# Altium PCB 电子脚铐便携式主控板V3-改版.PcbDoc (part 1 of 3)
Units mm, origin at the board's own origin, x right, y up, seen from the top; angles counter-clockwise.
Board outline 54 x 110 mm, 2 copper layers (Top Layer, Bottom Layer), stack 1.671 mm thick; 103 components, 64 nets, 340 pads, 43 vias.
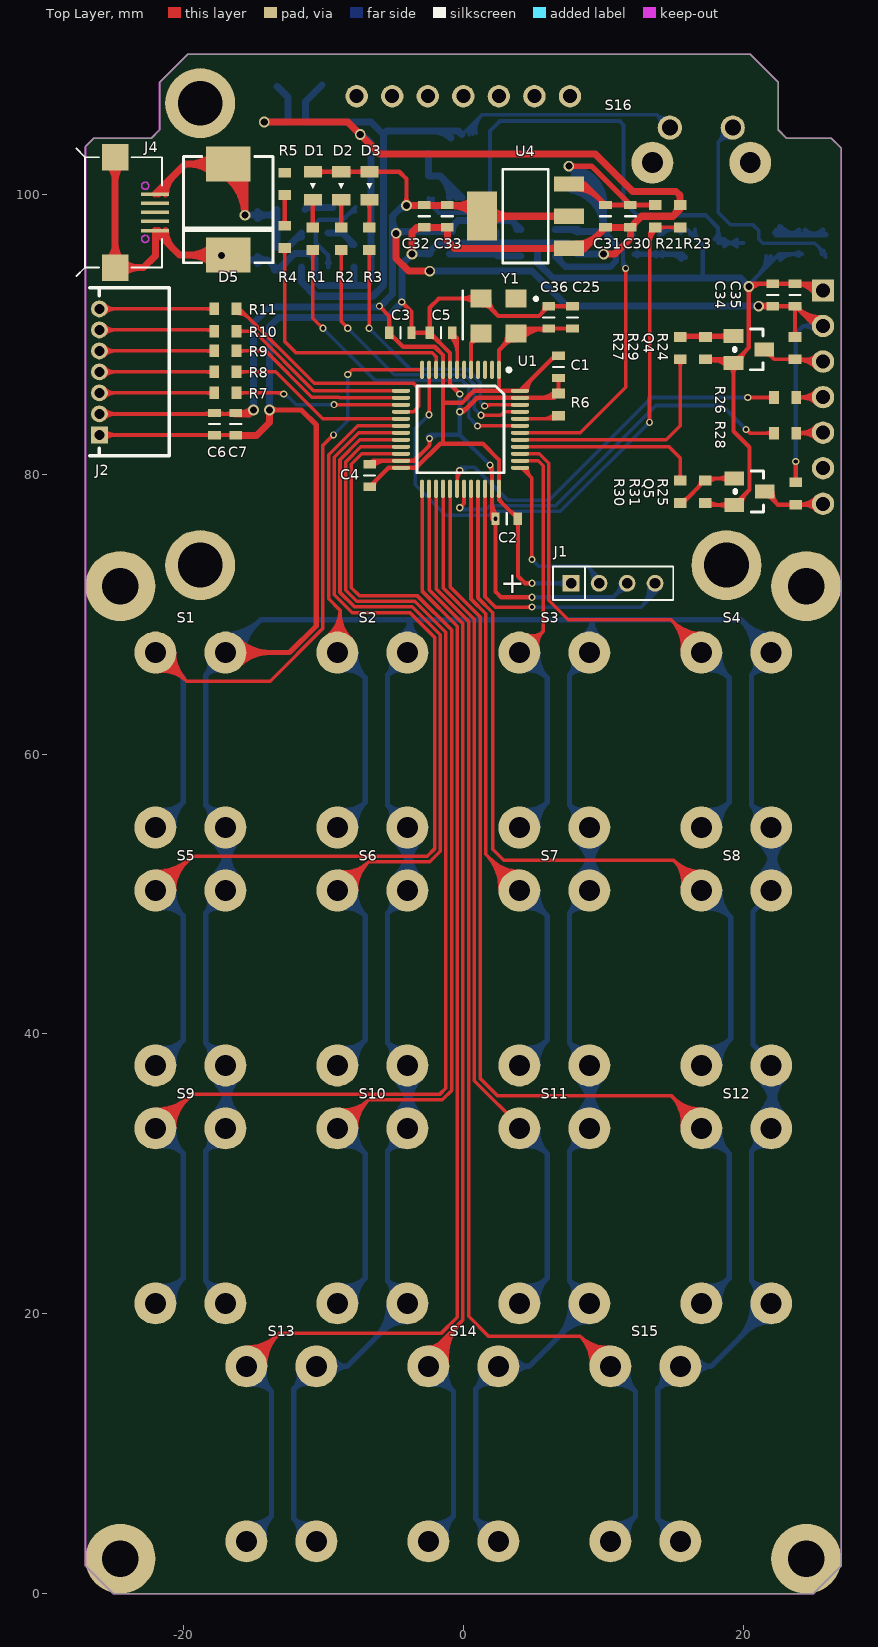
[diagram p0: Top Layer view]
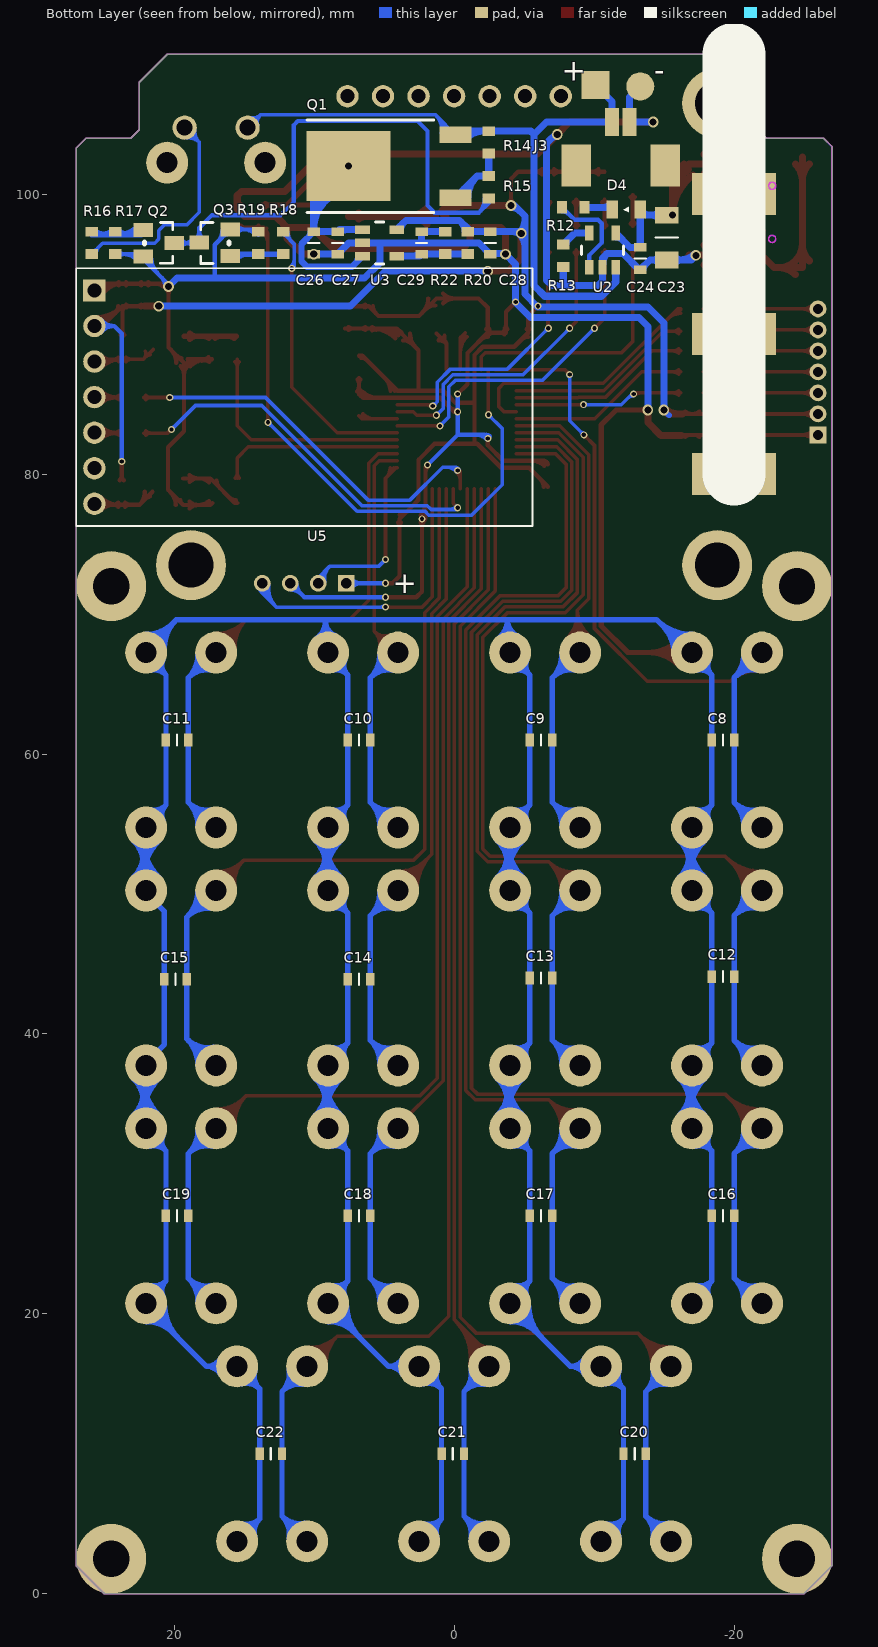
[diagram p1: Bottom Layer view, seen from below]
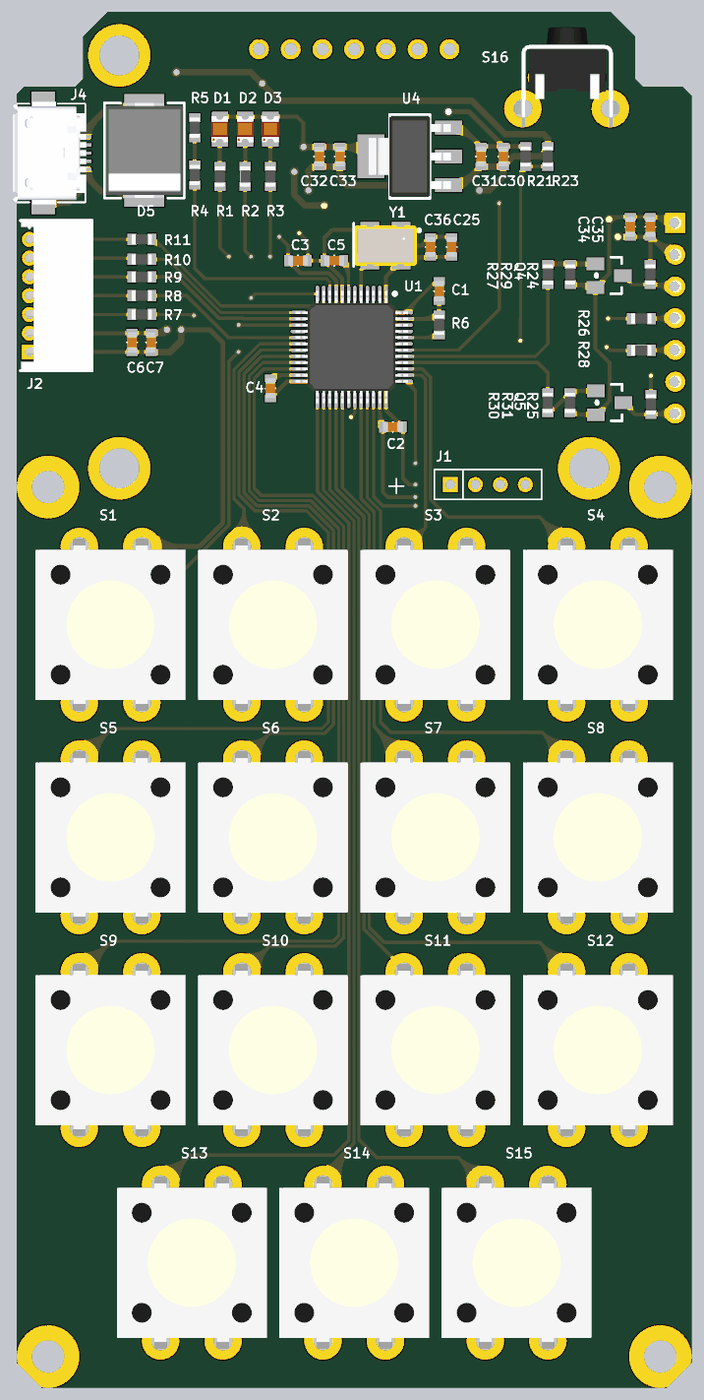
[diagram p4: 3D render of the assembled board from above, using the file's embedded part models]
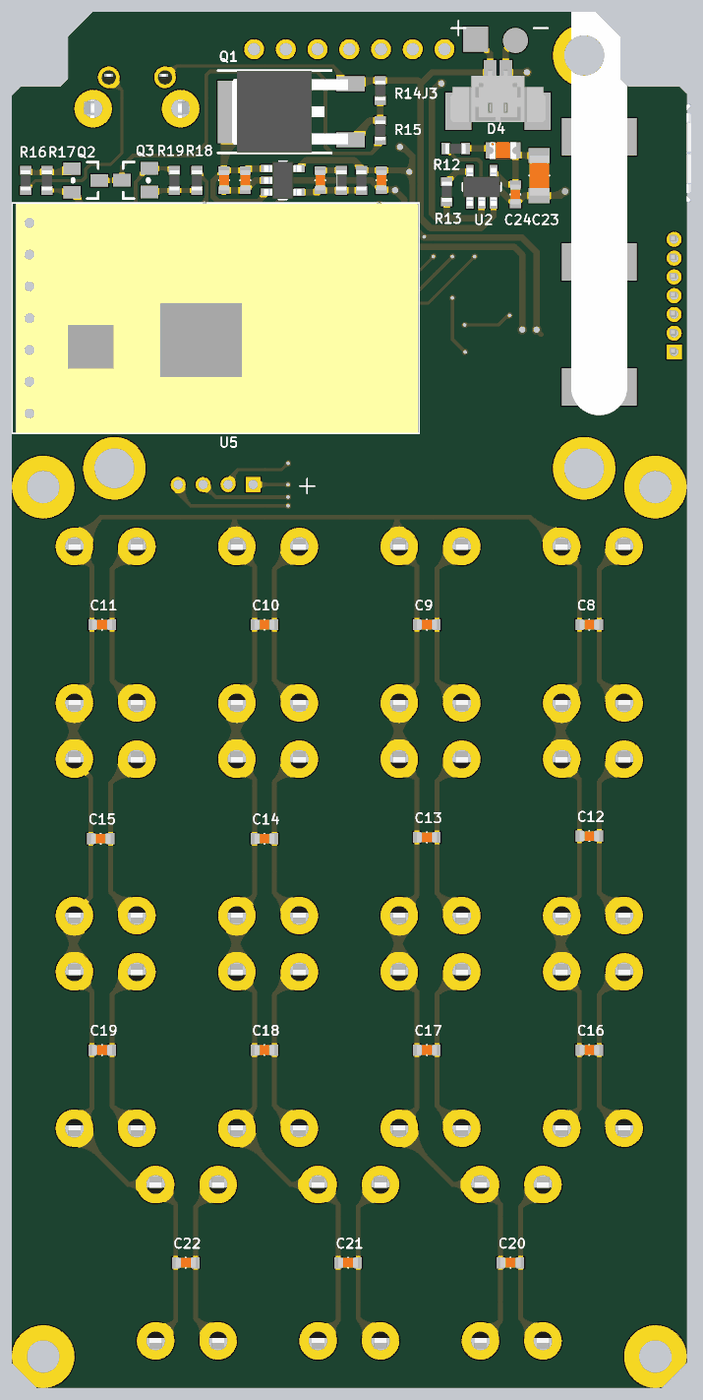
[diagram p5: 3D render of the assembled board from below, using the file's embedded part models]

## Layer stack, top to bottom
Top Solder: solder mask 0.0102, Solder Resist, Dk 3.5
Top Layer: signal copper 0.0356
Dielectric 1: dielectric 1.6, FR-4, Dk 4.8
Bottom Layer: signal copper 0.0356
Bottom Solder: solder mask 0.0102, Solder Resist, Dk 3.5

## Board outline
-27,2 -25,0 25,0 27,2 27,103.3 26.3,104 23.1,104 22.5,104.6 22.5,108 20.5,110 -19.7,110 -21.7,108 -21.7,104.6 -22.3,104 -26.4,104 -27,103.4

## Design rules (kind name [scope] priority, off if disabled: settings)
Clearance [All] p1: gap=0.152
ComponentClearance [All] p1: gap=0 collisioncheckmode=3 verticalgap=0 showdistances=FALSE
Height [All] p1: minheight=0 maxheight=50.8 prefheight=12.7
HoleSize [All] p1: absolutevalues=TRUE maxlimit=5.08 minlimit=0.025 maxpercent=80.000 minpercent=20.000
HoleToHoleClearance [All] p1: gap=0.152 allowstackedmicrovias=TRUE
MinimumSolderMaskSliver [All] p1: minsoldermaskwidth=0
PlaneConnect [All] p1: planeconnectstyle=Direct reliefexpansion=0.508 reliefentries=4 reliefconductorwidth=0.254 reliefairgap=0.254
PolygonConnect [All] p1: connectstyle=Direct reliefconductorwidth=0.254 reliefentries=4 polygonreliefangle="90 Angle" airgapwidth=0.254
RoutingVias [All] p1: holewidth=0.711 width=1.27 viastyle="Through Hole" minholewidth=0.203 minwidth=0.305 maxholewidth=5.08 maxwidth=7.62
SilkToSilkClearance [All] p1: silktosilkclearance=0
SilkToSolderMaskClearance [IsPad] p1: minsilkscreentomaskgap=0 clearancetoexposedcopper=TRUE
SolderMaskExpansion [All] p1: expansion=0.102
Width [All] p1: maxlimit=4 minlimit=0.254 preferedwidth=0.254
21 further rules are at their usual default settings.

## Classes and differential pairs
component class 电子脚铐便携式主控板-Frame: C6 C7 J2 R7 R8 R9 R10 R11
component class Designator: C23 C24 C26 C27 C28 C29 C30 C31 C32 C33 D4 D5 J3 J4 Q1 Q2 Q3 R12 R13 R14 R15 R16 R17 R19 R20 R21 R22 R23 S16 U2 U3 U4

## Components (designator, comment, footprint, x,y, rotation, side; value= is the part's Value field where it differs from the comment)
C1 "0.1uF" C0603 6.8,87.662 r270 top
C2 "0.1uF" C0603 3.1,76.8 r180 top
C3 "0.1uF" C0603 -4.5,90.1 r0 top
C4 "0.1uF" C0603 -6.7,79.9 r90 top
C5 "0.1uF" C0603 -1.6,90.1 r180 top
C6 "10uF" C0603 -17.78,83.566 r270 top
C7 "0.1uF" C0603 -16.256,83.566 r270 top
C8 "0.1uF" C0603 -19.212,61 r0 bottom
C9 "0.1uF" C0603 -6.212,61 r0 bottom
C10 "0.1uF" C0603 6.788,61 r0 bottom
C11 "0.1uF" C0603 19.788,61 r0 bottom
C12 "0.1uF" C0603 -19.212,44.1 r0 bottom
C13 "0.1uF" C0603 -6.212,44 r0 bottom
C14 "0.1uF" C0603 6.788,43.9 r0 bottom
C15 "0.1uF" C0603 19.9,43.9 r0 bottom
C16 "0.1uF" C0603 -19.212,27 r0 bottom
C17 "0.1uF" C0603 -6.212,27 r0 bottom
C18 "0.1uF" C0603 6.788,27 r0 bottom
C19 "0.1uF" C0603 19.788,27 r0 bottom
C20 "0.1uF" C0603 -12.904,10 r0 bottom
C21 "0.1uF" C0603 0.096,10 r0 bottom
C22 "0.1uF" C0603 13.096,10 r0 bottom
C23 "10uF" C1206 -15.2,96.9 r270 bottom
C24 "0.1uF" C0603 -13.3,95.4 r270 bottom
C25 "10uF" C0603 7.8,91.2 r270 top
C26 "10uF" C0603 10.024,96.519 r270 bottom
C27 "0.1uF" C0603 8.324,96.519 r90 bottom
C28 "10uF" C0603 -2.576,96.519 r270 bottom
C29 "470pF" C0603 2.324,96.519 r90 bottom
C30 "10uF" C0603 11.938,98.425 r270 top
C31 "0.1uF" C0603 10.16,98.425 r270 top
C32 "10uF" C0603 -2.794,98.425 r270 top
C33 "0.1uF" C0603 -1.143,98.425 r270 top
C34 "10uF" C0603 22.1,92.8 r90 top
C35 "0.1uF" C0603 23.7,92.8 r90 top
C36 "0.1uF" C0603 6.1,91.2 r270 top
D1 "LED" LED0805 -10.749,100.603 r270 top
D2 "LED" LED0805 -8.729,100.603 r270 top
D3 "LED" LED0805 -6.708,100.603 r270 top
D4 "LED-G" LED0805 -12.3,98.9 r0 bottom
D5 "1.5SMC6.8A" SMC -16.8,98.9 r270 top
J1 "SHD1X4-2.00" Jk1*4-2.0 10.7,72.2 r0 top
J2 "Jack 1x7" ZH-7AWD -26,87.3 r90 top
J3 "Jack 1x2" DF13-2P-1.25V -11.9,103.6 r180 bottom locked
J4 "MicroUSB" MICRO-USB -23.2,98.7 r90 top
Q1 "2SA1615" TO-252 3.724,102 r90 bottom
Q2 "S8050" SOT-23 21.1,96.507 r270 bottom
Q3 "S8050" SOT-23 17.1,96.531 r90 bottom
Q4 "S8050" SOT-23 20.4,88.9 r270 top
Q5 "S8050" SOT-23 20.447,78.74 r270 top
R1 "1K" R0603 -10.749,96.82 r270 top
R2 "1K" R0603 -8.729,96.82 r270 top
R3 "1K" R0603 -6.708,96.82 r270 top
R4 "NC" R0603 -12.762,96.947 r270 top
R5 "NC" R0603 -12.762,100.73 r270 top
R6 "100K" R0603 6.8,84.962 r90 top
R7 "0R" R0603 -17,85.8 r180 top
R8 "0R" R0603 -17,87.3 r180 top
R9 "0R" R0603 -17,88.8 r180 top
R10 "0R" R0603 -17,90.2 r180 top
R11 "0R" R0603 -17,91.8 r180 top
R12 "1K" R0603 -8.509,99.06 r180 bottom
R13 "1.65K" R0603 -7.8,95.6 r90 bottom
R14 "200K" R0603 -2.476,103.7 r270 bottom
R15 "0R" R0603 -2.476,100.5 r270 bottom
R16 "20K" R0603 25.9,96.519 r90 bottom
R17 "10K" R0603 24.2,96.519 r270 bottom
R18 "20K" R0603 12.2,96.519 r270 bottom
R19 "10K" R0603 14,96.519 r90 bottom
R20 "100K" R0603 -0.976,96.519 r270 bottom
R21 "200K" R0603 13.716,98.425 r270 top
R22 "160K" R0603 0.624,96.519 r90 bottom
R23 "100K" R0603 15.494,98.425 r90 top
R24 "200K" R0603 23.7,89 r90 top
R25 "200K" R0603 23.749,78.613 r90 top
R26 "200K" R0603 22.987,85.471 r180 top
R27 "200K" R0603 15.5,89 r270 top
R28 "200K" R0603 22.987,82.931 r180 top
R29 "10K" R0603 17.3,89 r90 top
R30 "200K" R0603 15.494,78.74 r90 top
R31 "10K" R0603 17.272,78.74 r90 top
S1 "Switch" B3F-4055 -19.5,61 r90 top
S2 "Switch" B3F-4055 -6.5,61 r90 top
S3 "Switch" B3F-4055 6.5,61 r90 top
S4 "Switch" B3F-4055 19.5,61 r90 top
S5 "Switch" B3F-4055 -19.5,44 r90 top
S6 "Switch" B3F-4055 -6.5,44 r90 top
S7 "Switch" B3F-4055 6.5,44 r90 top
S8 "Switch" B3F-4055 19.5,44 r90 top
S9 "Switch" B3F-4055 -19.5,27 r90 top
S10 "Switch" B3F-4055 -6.5,27 r90 top
S11 "Switch" B3F-4055 6.5,27 r90 top
S12 "Switch" B3F-4055 19.5,27 r90 top
S13 "Switch" B3F-4055 -13,10 r90 top
S14 "Switch" B3F-4055 0,10 r90 top
S15 "Switch" B3F-4055 13,10 r90 top
S16 "Switch" SWITCH-H 17,103.5 r180 top
U1 "STM32F103CB" LQFP48 -0.2,83.2 r270 top
U2 "SE9016" SOT-23-5 -10.6,96 r90 bottom
U3 "MIC5219YM5" SOT-23-5 5.324,96.519 r180 bottom
U4 "LM1117IMPX-3.3" SOT-223 4.445,98.425 r90 top
U5 "APC340" APC340 25.7,85.5 r180 bottom locked
Y1 "8MHz" XTAL5032 2.5,91.3 r180 top

## Footprints (in the part's own frame and the unit in brackets; to place one, negate y for a bottom-side part, rotate by r counter-clockwise, add the part's x,y. Pads: shape width x height; smd on the part's side, far side on the other; paste and mask are expansions set on the pad)
APC340 [mm]
  rect 1.6x1.6 hole 1: 1(0,7.62)
  round 1.6 hole 1: 2(0,5.08) 3(0,2.54) 4(0,0) 5(0,-2.54) 6(0,-5.08) 7(0,-7.62)
  silkscreen extent -1.3,-9.2 31.3,9.2, body extent -1,-9.15 31.2,9.15, height 2
B3F-4055 [mm]
  round 3 hole 1.5: 1(-6.25,-2.5) 1(6.25,-2.5) 2(-6.25,2.5) 2(6.25,2.5)
  body extent -6.9,-6 6.9,6, height 7.3
C0603 [mm]
  rect 0.6x0.9 smd: 1(-0.8,0) 2(0.8,0)
  silkscreen extent 0,-0.4 0,0.4, body extent -0.8,-0.4 0.8,0.4, height 0.5
C1206 [mm]
  rect 1.2x1.7 smd: 1(-1.6,0) 2(1.6,0)
  silkscreen extent 0,-0.8 0,0.8, body extent -1.6,-0.8 1.6,0.8, height 1.25
DF13-2P-1.25V [mm]
  rect 1x2 smd: 1(-0.625,1.55) 2(0.625,1.55)
  rect 2.1x3 smd: 3(-3.175,-1.55) 4(3.175,-1.55)
  body extent -3.83,-2.41 3.82,1.79, height 4.8
Jk1*4-2.0 [mm] "4P，直插，2.0mm间距，排母"
  rect 1.2x1.2 hole 0.762: 1(-3,0)
  round 1.2 hole 0.762: 2(-1,0) 3(1,0) 4(3,0)
  silkscreen extent -4.3,-1.2 4.3,1.2, body extent -4.25,-1.22 4.25,1.18, height 4.3
LED0805 [mm]
  rect 0.8x1.3 smd: 1(-1,0) 2(1,0)
  silkscreen extent -0.18,-0.2 0.22,0.2, body extent -1.05,-0.68 1.05,0.67, height 0.8
LQFP48 [mm]
  oval 1.3x0.28 smd: 1(-4.25,2.75) 2(-4.25,2.25) 3(-4.25,1.75) 4(-4.25,1.25) 5(-4.25,0.75) 6(-4.25,0.25) 7(-4.25,-0.25) 8(-4.25,-0.75) 9(-4.25,-1.25) 10(-4.25,-1.75) 11(-4.25,-2.25) 12(-4.25,-2.75) 25(4.25,-2.75) 26(4.25,-2.25) 27(4.25,-1.75) 28(4.25,-1.25) 29(4.25,-0.75) 30(4.25,-0.25) 31(4.25,0.25) 32(4.25,0.75) 33(4.25,1.25) 34(4.25,1.75) 35(4.25,2.25) 36(4.25,2.75)
  oval 0.28x1.3 smd: 13(-2.75,-4.25) 14(-2.25,-4.25) 15(-1.75,-4.25) 16(-1.25,-4.25) 17(-0.75,-4.25) 18(-0.25,-4.25) 19(0.25,-4.25) 20(0.75,-4.25) 21(1.25,-4.25) 22(1.75,-4.25) 23(2.25,-4.25) 24(2.75,-4.25) 37(2.75,4.25) 38(2.25,4.25) 39(1.75,4.25) 40(1.25,4.25) 41(0.75,4.25) 42(0.25,4.25) 43(-0.25,4.25) 44(-0.75,4.25) 45(-1.25,4.25) 46(-1.75,4.25) 47(-2.25,4.25) 48(-2.75,4.25)
  silkscreen extent -4.37,-3.1 3.1,3.58, body extent -4.49,-4.5 4.51,4.5, height 1.8
MICRO-USB [mm]
  rect 0.25x2 smd: 1(1.3,-1.179) 2(0.65,-1.179) 3(0,-1.179) 4(-0.65,-1.179) 5(-1.3,-1.179)
  rect 1.9x1.9 smd: 5(-3.95,1.679) 5(3.95,1.679)
  Keep-Out Layer circle w0.102: c1.9,-0.471 r0.254
  Keep-Out Layer circle w0.102: c-1.9,-0.471 r0.254
  silkscreen extent -4.57,-1.68 4.57,4.46, body extent -4.1,-1.75 4.1,4.18, height 2.77
R0603 [mm]
  rect 0.7x0.9 smd: 1(-0.8,0) 2(0.8,0)
  body extent -0.8,-0.4 0.8,0.4, height 0.37
SMC [mm]
  rect 2.5x3.2 smd: 1(-3.25,0) 2(3.25,0)
  silkscreen extent -3.8,-3.2 3.8,3.2, body extent -3.8,-3.1 3.8,3.12, height 2.8
SOT-23 [mm]
  rect 1x1.4 smd: 1(-0.95,-1.1) 2(0.95,-1.1) 3(0,1.1)
  silkscreen extent -1.47,-1.02 1.45,1, body extent -1.41,-1 1.38,1.42, height 1.09
SOT-23-5 [mm]
  rect 1.05x0.6 smd: 1(-1.225,0.95) 2(-1.225,0) 3(-1.225,-0.95) 4(1.225,-0.95) 5(1.225,0.95)
  silkscreen extent -0.3,-1.5 0.3,1.5, body extent -1.5,-1.5 1.5,1.5, height 1.2
SOT-223 [mm]
  rect 1.1x2.15 smd: 1(-2.3,-3.1) 2(0,-3.1) 3(2.3,-3.1)
  rect 3.5x2.15 smd: 4(0,3.1)
  silkscreen extent -3.35,-1.63 3.35,1.63, body extent -3.15,-3.3 3.15,3.3, height 1.8
SWITCH-H [mm]
  round 3 hole 1.5: 0(-3.5,1.25) 0(3.5,1.25)
  round 1.727 hole 1.143: 1(-2.25,-1.25) 2(2.25,-1.25)
  body extent -4.23,-5.26 4.13,2.71, height 7.37
TO-252 [mm]
  rect 1.2x2.28 smd: 1(-2.25,-3.816) 3(2.25,-3.816)
  rect 5x6 smd: 2(0,3.816)
  silkscreen extent -3.3,-2.27 3.3,6.78, body extent -3.25,-3.62 3.25,5.68, height 2.3
XTAL5032 [mm]
  rect 1.5x1.3 smd: 1(-1.25,-1.25) 2(1.25,-1.25) 3(1.25,1.25) 4(-1.25,1.25)
  silkscreen extent -2.81,-1.78 2.54,1.65, body extent -2.5,-1.6 2.5,1.6, height 1.2
ZH-7AWD [mm] "1.5mm，7P，卧插"
  rect 1.2x1.2 hole 0.7: 1(-4.5,0)
  round 1.2 hole 0.7: 2(-3,0) 3(-1.5,0) 4(0,0) 5(1.5,0) 6(3,0) 7(4.5,0)
  silkscreen extent -6,-5 6,0.7, body extent -5.9,-5.05 6.1,0.65, height 3.95

## Part data
C1 C2 C3 C4 C5 C8 C9 C10 C11 C12 C13 C14 C15 C16 C17 C18 C19 C20 C21 C22 C25 C27 C36: library part "Cap Semi"
C6 C7 C26 C28 C29 C30 C31 C32 C33 C34 C35: library part CAP, "CAP"
C23 C24: library part Cap, "Capacitor"
D4: library part LED
D5: library part Diode-TVS
J1: library part HEADER1X4
J2 J3: "插座"
Q1: library part MJD122
Q2 Q3 Q4 Q5: "NPN triode, 0.5A Max"
R1 R2 R3 R4 R5 R12 R13: library part Res, "Resistor"
R6 R7 R8 R9 R10 R11 R14 R16 R17 R18 R19 R20 R21 R22 R23: library part Res
R15 R24 R25 R26 R27 R28 R29 R30 R31: library part RES, "Resistor"
S1 S2 S3 S4 S5 S6 S7 S8 S9 S10 S11 S12 S13 S14 S15 S16: library part Sw
U1: library part STM32F103Cx
U3: library part MIC5205
U4: library part AMS1117, "800mA Low-Dropout Linear Regulator"
Y1: library part XTAL, "SM crystal oscilator"

## Free pads (board coordinates)
  round 5 hole 2.6: ""(-24.5,2.5) ""(-24.5,72) ""(24.5,2.5) ""(24.5,72)
  rect 2x3 smd far side: ""(-22,80) ""(-22,90) ""(-22,100) ""(-18,80) ""(-18,90) ""(-18,100)
  round 5 hole 3.2: ""(-18.8,73.5) ""(-18.8,106.5) ""(18.8,73.5)
  round 2 smd far side: ""(-13.3,107.7)
  rect 2x2 smd far side: ""(-10.1,107.8)
  round 1.6 hole 1: ""(-7.62,107) ""(-5.08,107) ""(-2.54,107) ""(0,107) ""(2.54,107) ""(5.08,107) ""(7.62,107)

## Via types
v1: diameter 0.508, hole 0.305, Top Layer to Bottom Layer, tented both sides, 29 vias
v2: diameter 0.762, hole 0.508, Top Layer to Bottom Layer, tented both sides, 14 vias

## Nets (pads, with @x,y where several pads share a name; then routed paths per layer and width w, separated by ;. In a path a pad name is that pad's centre, name@x,y a point inside that pad or via, vN(x,y) a via of type N, cw(c..) or ccw(c..) an arc to the next point about the centre after c; other vN are vias at no path point)
+3.3V: C1.1 C2.1 C3.1 C4.1 C6.1 C7.1 C25.2 C28.1 C32.1 C33.1 C34.1 C35.1 C36.2 D1.1 D2.1 D3.1 J1.1 J2.2 R20.1 R24.2 R25.2 U1.1 U1.9 U1.24 U1.36 U1.48 U3.5 U4.2 U4.4 U5.2 Y1.4 | length 221.6
  Top Layer w0.305: J2.2@-26,84.3 C7.1@-16.3,84.3 ; J2.2@-25.683,83.984 cw(c-24.919,83.219) -24.919,84.3 cw(c-24.919,85.381) J2.2@-25.683,84.617 ; -18.446,84.3 ccw(c-18.446,84.882) C6.1@-18.034,84.47 ; C6.1@-17.526,84.47 ccw(c-17.114,84.882) -17.114,84.3 ; -16.922,84.3 ccw(c-16.922,84.882) C7.1@-16.51,84.47 ; D1.1@-10.749,101.603 D2.1@-8.729,101.603 D3.1@-6.708,101.603 -4.575,101.603 -4.064,101.092 v2(-4.064,99.187) ; D1.1@-10.324,101.428 cw(c-9.901,101.005) -9.901,101.603 cw(c-9.901,102.201) D1.1@-10.324,101.778 ; D2.1@-9.154,101.428 ccw(c-9.576,101.005) -9.576,101.603 ccw(c-9.576,102.201) D2.1@-9.154,101.778 ; D2.1@-8.304,101.428 cw(c-7.881,101.005) -7.881,101.603 cw(c-7.881,102.201) D2.1@-8.304,101.778 ; D3.1@-7.133,101.428 ccw(c-7.556,101.005) -7.556,101.603 ccw(c-7.556,102.201) D3.1@-7.133,101.778 ; C4.1@-6.7,79.1 -5.35,80.45 U1.24@-4.45,80.45 -3.37,80.45 -1.651,82.169 1.397,82.169 2.55,81.016 U1.36@2.55,78.95 2.55,78.15 C2.1@3.9,76.8 3.9,72.7 4.4,72.2 v1(4.9,72.2) ; C4.1@-6.402,79.1 cw(c-5.684,79.1) -6.192,79.608 ; D3.1@-6.283,101.428 cw(c-5.861,101.005) -5.861,101.603 cw(c-5.861,102.201) D3.1@-6.283,101.778 ; v1(-6,92) -5.3,91.3 C3.1@-5.3,90.1 -4.3,89.1 -2.047,89.1 -1.45,88.503 U1.9@-1.45,87.45 -1.45,85.09 ; C3.1@-5.404,90.354 ccw(c-5.656,90.606) -5.3,90.606 ccw(c-4.944,90.606) C3.1@-5.196,90.354 ; C3.1@-5.3,89.802 cw(c-5.3,89.084) -4.792,89.592 ; v2@-4.226,99.349 ccw(c-4.616,99.739) -4.064,99.739 ccw(c-3.512,99.739) v2@-3.902,99.349 ; -1.45,82.169 -1.45,85.09 ; U1.36@2.538,78.44 ccw(c3.208,78.44) 2.734,77.966 ; 2.73,89.03 ccw(c1.71,90.05) Y1.4@3.152,90.05 ; 2.971,89.271 cw(c3.65,88.593) Y1.4@3.65,89.552 ; 3.392,77.308 ccw(c3.9,77.816) C2.1@3.9,77.098 ; Y1.4@3.771,90.129 cw(c4.425,89.475) Y1.4@4.425,90.4 ; C2.1@3.796,76.546 cw(c3.544,76.294) 3.9,76.294 cw(c4.256,76.294) C2.1@4.004,76.546 ; Y1.4@3.986,89.914 cw(c5.16,88.74) 5.16,90.4 ; Y1.4@4.202,89.698 cw(c5.896,88.004) C36.2@5.896,90.4 ; U1.48@4.243,85.95 cw(c4.708,85.95) 4.379,86.279 ; U1.48@4.548,85.95 cw(c5.749,85.95) 4.899,86.799 ; 5.571,90.319 cw(c5.668,89.93) C36.2@5.874,90.273 ; 5.632,90.334 ccw(c5.556,90.637) C36.2@5.823,90.476 ; C36.2@5.846,90.296 ccw(c5.594,90.044) 5.594,90.4 ccw(c5.594,90.756) C36.2@5.846,90.504 ; 6.248,88.148 cw(c6.65,87.746) C1.1@6.65,88.314 ; C36.2@6.354,90.296 cw(c6.606,90.044) 6.606,90.4 cw(c6.606,90.756) C36.2@6.354,90.504 ; C1.1@6.8,88.462 6.562,88.462 U1.48@4.05,85.95 0.761,85.95 0.305,85.494 ; C25.2@7.546,90.296 ccw(c7.294,90.044) 7.294,90.4 ccw(c7.294,90.756) C25.2@7.546,90.504 ; C25.2@7.8,90.4 C36.2@6.1,90.4 4.1,90.4 Y1.4@3.75,90.05 2.55,88.85 U1.1@2.55,87.45 2.55,85.979 0.762,85.979 0.305,85.522 0.305,85.494 ; C34.1@22.1,92 C35.1@23.7,92 ; C34.1@22.354,91.896 cw(c22.606,91.644) 22.606,92 cw(c22.606,92.356) C34.1@22.354,92.104 ; C35.1@23.446,91.896 ccw(c23.194,91.644) 23.194,92 ccw(c23.194,92.356) C35.1@23.446,92.104 ; R24.2@23.56,89.94 ccw(c23.223,90.277) 23.7,90.277 ccw(c24.177,90.277) R24.2@23.84,89.94 ; C35.1@23.596,91.896 cw(c23.344,91.644) 23.7,91.644 cw(c24.056,91.644) C35.1@23.804,91.896 ; R25.2@23.609,79.553 ccw(c23.272,79.89) 23.749,79.89 ccw(c24.226,79.89) R25.2@23.889,79.553 ; R24.2@23.7,89.8 C35.1@23.7,92 ; R25.2@23.749,79.749 v1(23.749,80.899) ; C35.1@23.998,92 ccw(c24.716,92) 24.208,91.492 ; 24.193,91.507 ccw(c25.608,92.922) U5.2@25.687,90.923 ; 24.686,91.014 ccw(c25.645,91.974) U5.2@25.699,90.618 ; U5.2@25.675,91.227 cw(c25.571,93.871) C35.1@23.7,92 ; U5.2@25.7,90.58 25.12,90.58 C35.1@23.7,92 ; -1.45,85.09 -0.099,85.09 0.305,85.494
  Top Layer w0.381: U4.4@0.545,99.225 U4.4@1.345,98.425
  Top Layer w0.508: C7.1@-16.3,84.3 -15.268,84.3 v2(-14.986,84.582) ; C7.1@-15.973,84.3 ccw(c-15.973,85.569) v2@-15.076,84.672 ; v2(-4.8,97.2) -4.8,95.4 -3.9,94.5 v2(-2.4,94.5) ; v2(-4.064,99.187) 0.507,99.187 U4.4@0.545,99.225 ; C33.1@-0.847,99.187 cw(c-0.847,96.908) U4.4@0.764,98.519 ; -0.427,99.187 ccw(c-0.427,100.872) U4.4@0.764,99.681 ; U4.4@1.345,98.425 U4.2@7.545,98.425 ; U4.4@1.926,97.844 cw(c3.327,96.443) 3.327,98.425 cw(c3.327,100.407) U4.4@1.926,99.006 ; U4.2@6.811,98.216 ccw(c6.305,97.71) 6.305,98.425 ccw(c6.305,99.14) U4.2@6.811,98.634 ; v2(21.1,92) C34.1@22.1,92
  Bottom Layer w0.305: v1(4.9,72.2) J1.1@7.7,72.2 ; J1.1@7.383,71.884 ccw(c6.619,71.119) 6.619,72.2 ccw(c6.619,73.281) J1.1@7.383,72.517 ; v1(23.749,80.899) 23.749,90.043 24.286,90.58 ; U5.2@25.21,90.157 ccw(c24.286,89.36) 24.286,90.58 ; U5.2@25.21,91.003 cw(c24.286,91.8) 24.286,90.58 ; U5.2@25.7,90.58 24.286,90.58
  Bottom Layer w0.381: -15.367,84.201 v2(-14.986,84.582)
  Bottom Layer w0.508: v2(-14.986,84.582) -14.986,90.805 -13.843,91.948 -5.969,91.948 -5.055,92.862 -5.055,96.799 ; -5.055,96.279 cw(c-3.879,96.279) -4.71,97.11 cw(c-4.206,96.606) -4.206,97.319 ; -5.055,98.121 ccw(c-3.879,98.121) v2@-4.71,97.29 ; v2@-4.926,97.183 cw(c-5.376,97.121) -5.055,96.799 ; -4.714,98.791 cw(c-4.064,98.14) v2@-4.064,99.06 ; v2(-4.064,99.187) -4.318,99.187 -5.055,98.45 -5.055,96.799 ; v2(-2.4,94.5) 4.9,94.5 7.4,92 v2(21.1,92) ; R20.1@-0.78,97.319 cw(c0.191,97.319) -0.496,98.006 ; 3.636,97.932 cw(c3.174,97.469) U3.5@3.828,97.469 ; U3.5@4.099,97.469 3.448,98.12 -0.381,98.12 -0.976,97.525 R20.1@-0.976,97.319 C28.1@-2.576,97.319 -4.535,97.319 -5.055,96.799 ; -5.055,96.725 cw(c-4.696,96.725) -4.773,97.076 ccw(c-4.696,96.725) -5.055,96.725
ADPOW: R21.2 R23.1 U1.11 | length 51.1
  Top Layer w0.254: v1@-2.54,84.328 ccw(c-2.757,84.545) -2.45,84.545 ccw(c-2.143,84.545) v1@-2.36,84.328 ; v1(-2.45,84.238) U1.11@-2.45,87.45 ; v1@13.21,83.79 ccw(c12.993,84.007) 13.3,84.007 ccw(c13.607,84.007) v1@13.39,83.79 ; v1(13.3,83.7) 13.3,85.49 ; 13.31,85.49 13.31,97.219 ; 13.31,96.347 cw(c14.894,96.347) R21.2@13.774,97.467 ; 13.31,96.96 cw(c14.281,96.96) R21.2@13.594,97.647 ; R21.2@13.401,97.566 cw(c13.058,97.471) 13.31,97.219 ; R21.2@13.406,97.315 cw(c13.616,97.105) R21.2@13.616,97.402 ; R21.2@13.974,97.467 cw(c14.354,97.087) 14.354,97.625 cw(c14.354,98.163) R21.2@13.974,97.783 ; R23.1@15.236,97.467 ccw(c14.856,97.087) 14.856,97.625 ccw(c14.856,98.163) R23.1@15.236,97.783 ; R23.1@15.494,97.625 R21.2@13.716,97.625 13.31,97.219
  Bottom Layer w0.254: v1@-2.577,84.238 cw(c-2.884,84.238) -2.667,84.021 cw(c-2.45,83.804) v1@-2.45,84.111 ; v1(-2.45,84.238) -3.429,83.259 -3.429,79.248 -1.245,77.064 1.809,77.064 2.079,77.333 6.933,77.333 v1(13.3,83.7) ; v1@13.173,83.7 cw(c12.866,83.7) 13.083,83.483 cw(c13.3,83.266) v1@13.3,83.573
BAT: J3.1 pad.@-10.1,107.8 Q1.3 R14.1 S16.2 U2.3 | length 55.4
  Bottom Layer w0.254: Q1.3@-0.092,104.25 1.322,105.664 ; Q1.3@0.414,104.243 cw(c1.229,104.398) 0.642,104.984 ; Q1.3@0.663,104.291 cw(c1.8,104.506) 0.982,105.324 ; Q1.3@0.913,104.338 cw(c2.372,104.614) 1.322,105.664 ; S16.2@14.036,104.933 ccw(c13.295,105.122) 13.836,105.664 ccw(c14.377,106.205) S16.2@14.567,105.464 ; S16.2@14.75,104.75 13.836,105.664 1.322,105.664
  Bottom Layer w0.508: U2.3@-11.55,94.775 -11.55,93.719 -10.541,92.71 -6.477,92.71 -5.715,93.472 -5.715,104.261 ; pad.@-10.1,107.8 -11.275,106.625 J3.1@-11.275,105.15 -6.604,105.15 -5.715,104.261 ; R14.1@-2.071,104.5 cw(c-2.071,102.811) Q1.3@-0.877,104.005 ; Q1.3@-0.092,104.25 -0.342,104.5 R14.1@-2.476,104.5 -5.476,104.5 -5.715,104.261
BATOUT: C26.1 C27.2 C30.1 C31.1 Q1.2 R21.1 U3.1 U3.3 U4.3 | length 50.9
  Top Layer w0.381: v2(7.54,102) 9.163,102 C30.1@11.938,99.225 ; U4.3@7.545,100.725 8.66,100.725 ; v2@7.675,101.865 cw(c8,101.54) 8,102 cw(c8,102.46) v2@7.675,102.135 ; U4.3@8.07,100.366 cw(c8.07,98.073) 9.691,99.694 ; U4.3@8.07,100.747 cw(c8.07,99.374) 9.04,100.345 ; U4.3@8.389,100.56 cw(c8.66,100.421) 8.66,100.725 ; U4.3@8.389,100.89 ccw(c8.66,101.029) 8.66,100.725 ; 9.717,99.668 cw(c9.274,99.225) C31.1@9.901,99.225 ; 11.495,99.668 cw(c11.052,99.225) C30.1@11.679,99.225 ; R21.1@13.503,99.112 ccw(c13.231,98.84) 13.231,99.225 ccw(c13.231,99.61) R21.1@13.503,99.338 ; R21.1@13.716,99.225 C30.1@11.938,99.225 ; 8.66,100.725 C31.1@10.16,99.225 C30.1@11.938,99.225
  Bottom Layer w0.457: U3.3@6.549,95.569 7.318,94.8 10.5,94.8 10.9,95.2 10.9,96.443 C26.1@10.024,97.319 ; U3.3@6.845,95.569 ccw(c7.561,95.569) 7.055,95.063 ; C26.1@10.245,97.319 ccw(c10.78,97.319) 10.402,96.941
  Bottom Layer w0.508: U3.1@6.549,97.469 8.174,97.469 C27.2@8.324,97.319 C26.1@10.024,97.319 10.024,99.516 v2(7.54,102) ; 7.701,97.469 cw(c7.701,96.846) C27.2@8.141,97.286 ; Q1.2@7.724,100.291 cw(c7.213,97.527) C26.1@10.024,97.527 ; Q1.2@7.816,100.791 cw(c7.326,98.137) 10.024,98.137 ; Q1.2@7.909,101.29 cw(c7.439,98.748) 10.024,98.748 ; Q1.2@8.001,101.79 cw(c7.551,99.358) 10.024,99.358
BOOT0: R6.1 U1.44 | length 4.3
  Top Layer w0.254: U1.44@4.05,83.95 6.588,83.95 R6.1@6.8,84.162 ; 5.65,83.95 ccw(c5.65,85.212) R6.1@6.542,84.32 ; 6.263,83.95 ccw(c6.263,84.599) R6.1@6.722,84.14